# Altium PCB Sensor_PCB.PcbDoc
Units mm, origin at the board's own origin, x right, y up, seen from the top; angles counter-clockwise.
Board outline 42 x 42 mm, 2 copper layers (Top Layer, Bottom Layer); 33 components, 25 nets, 129 pads, 25 vias.
Unrouted connection lines stored in the file: 2.
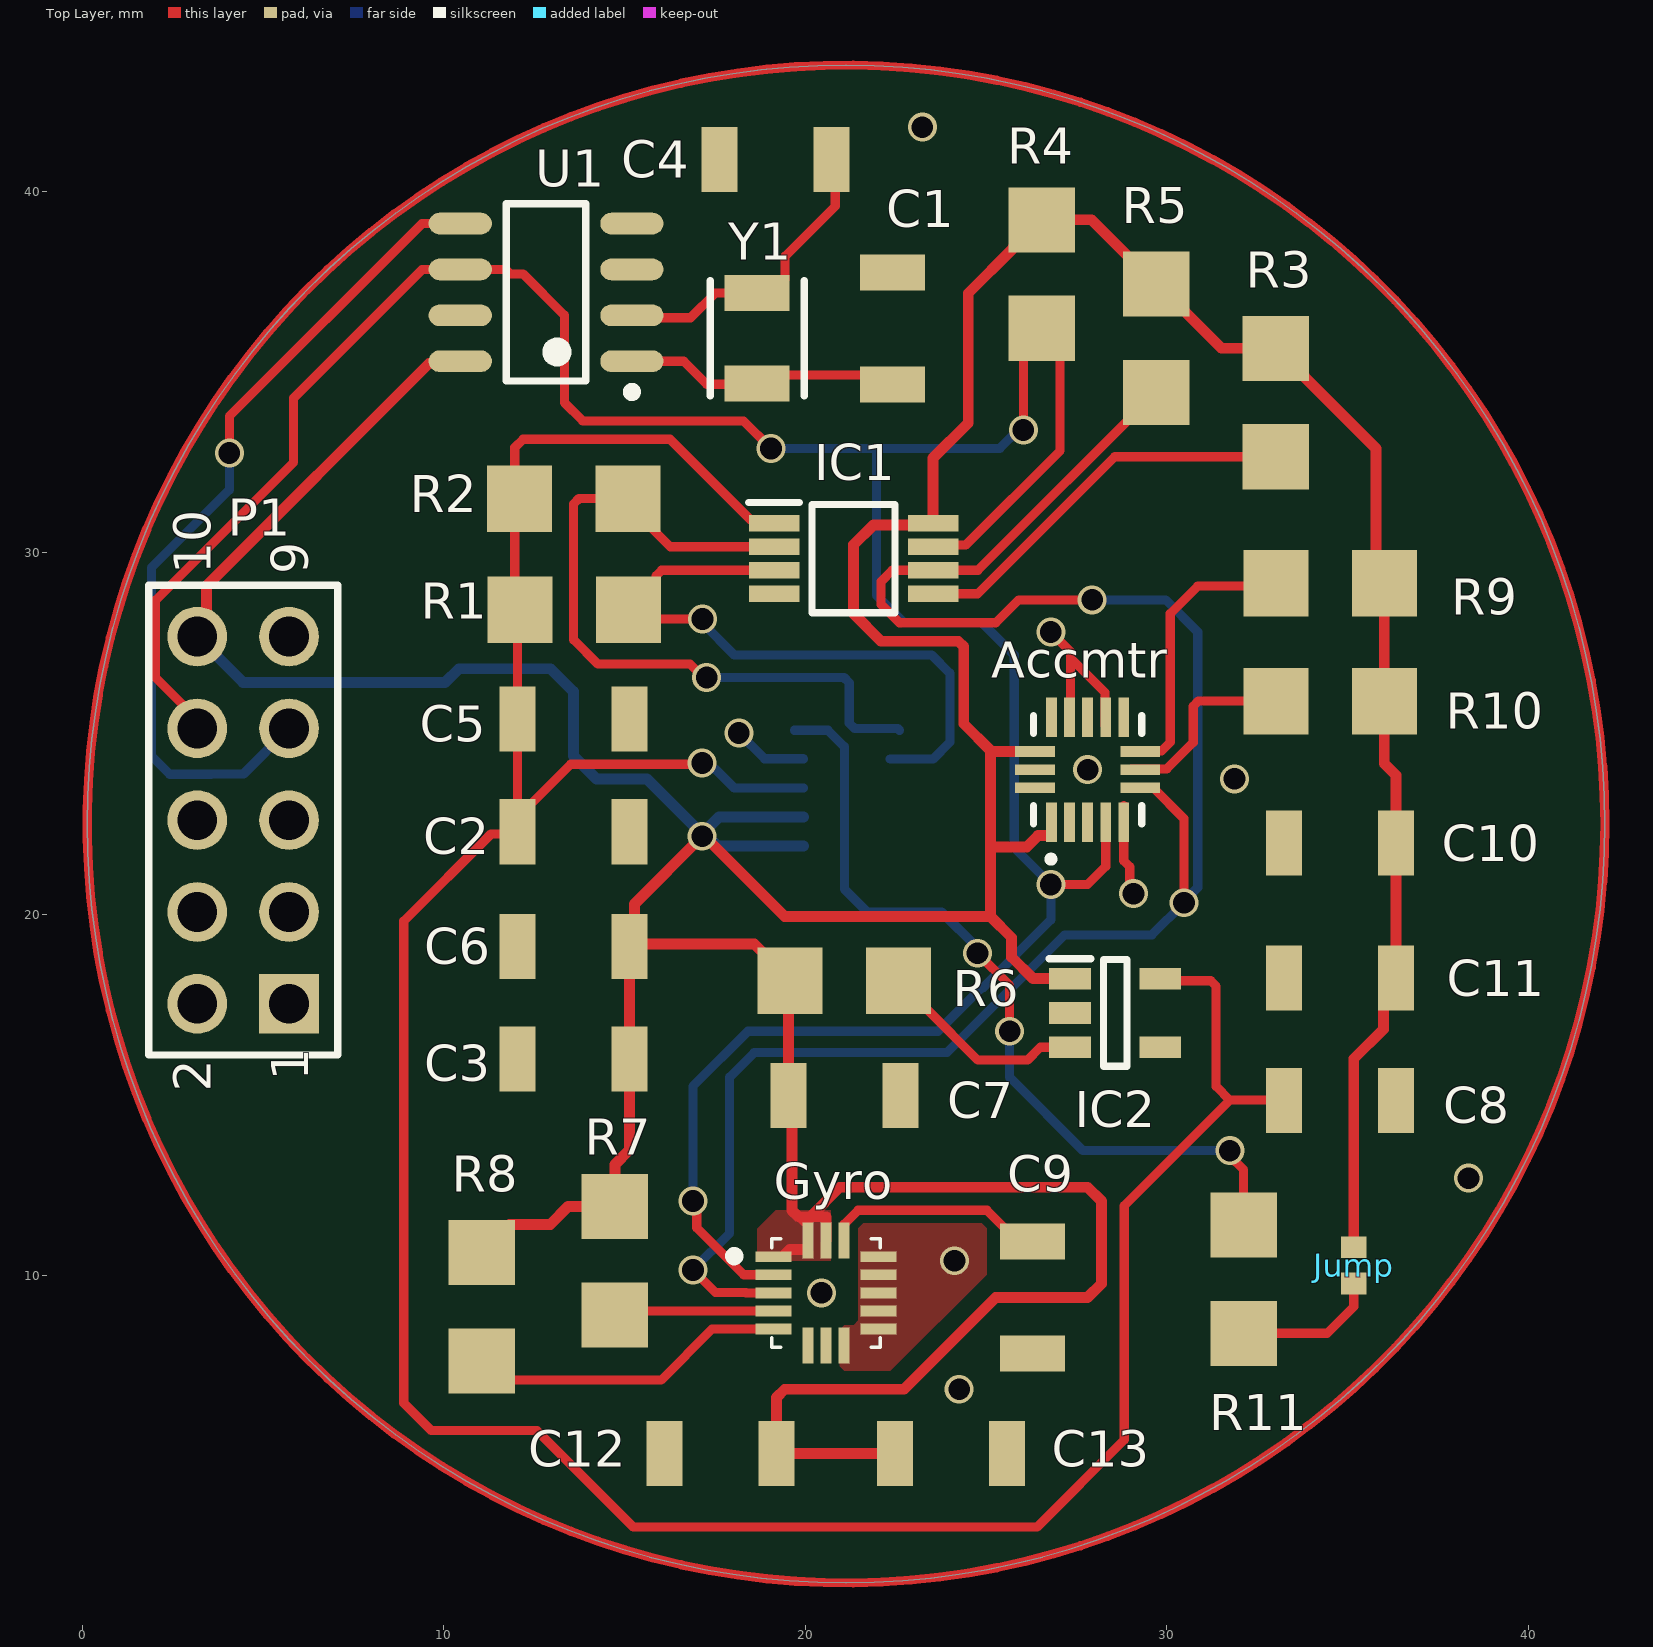
[diagram p0: Top Layer view]
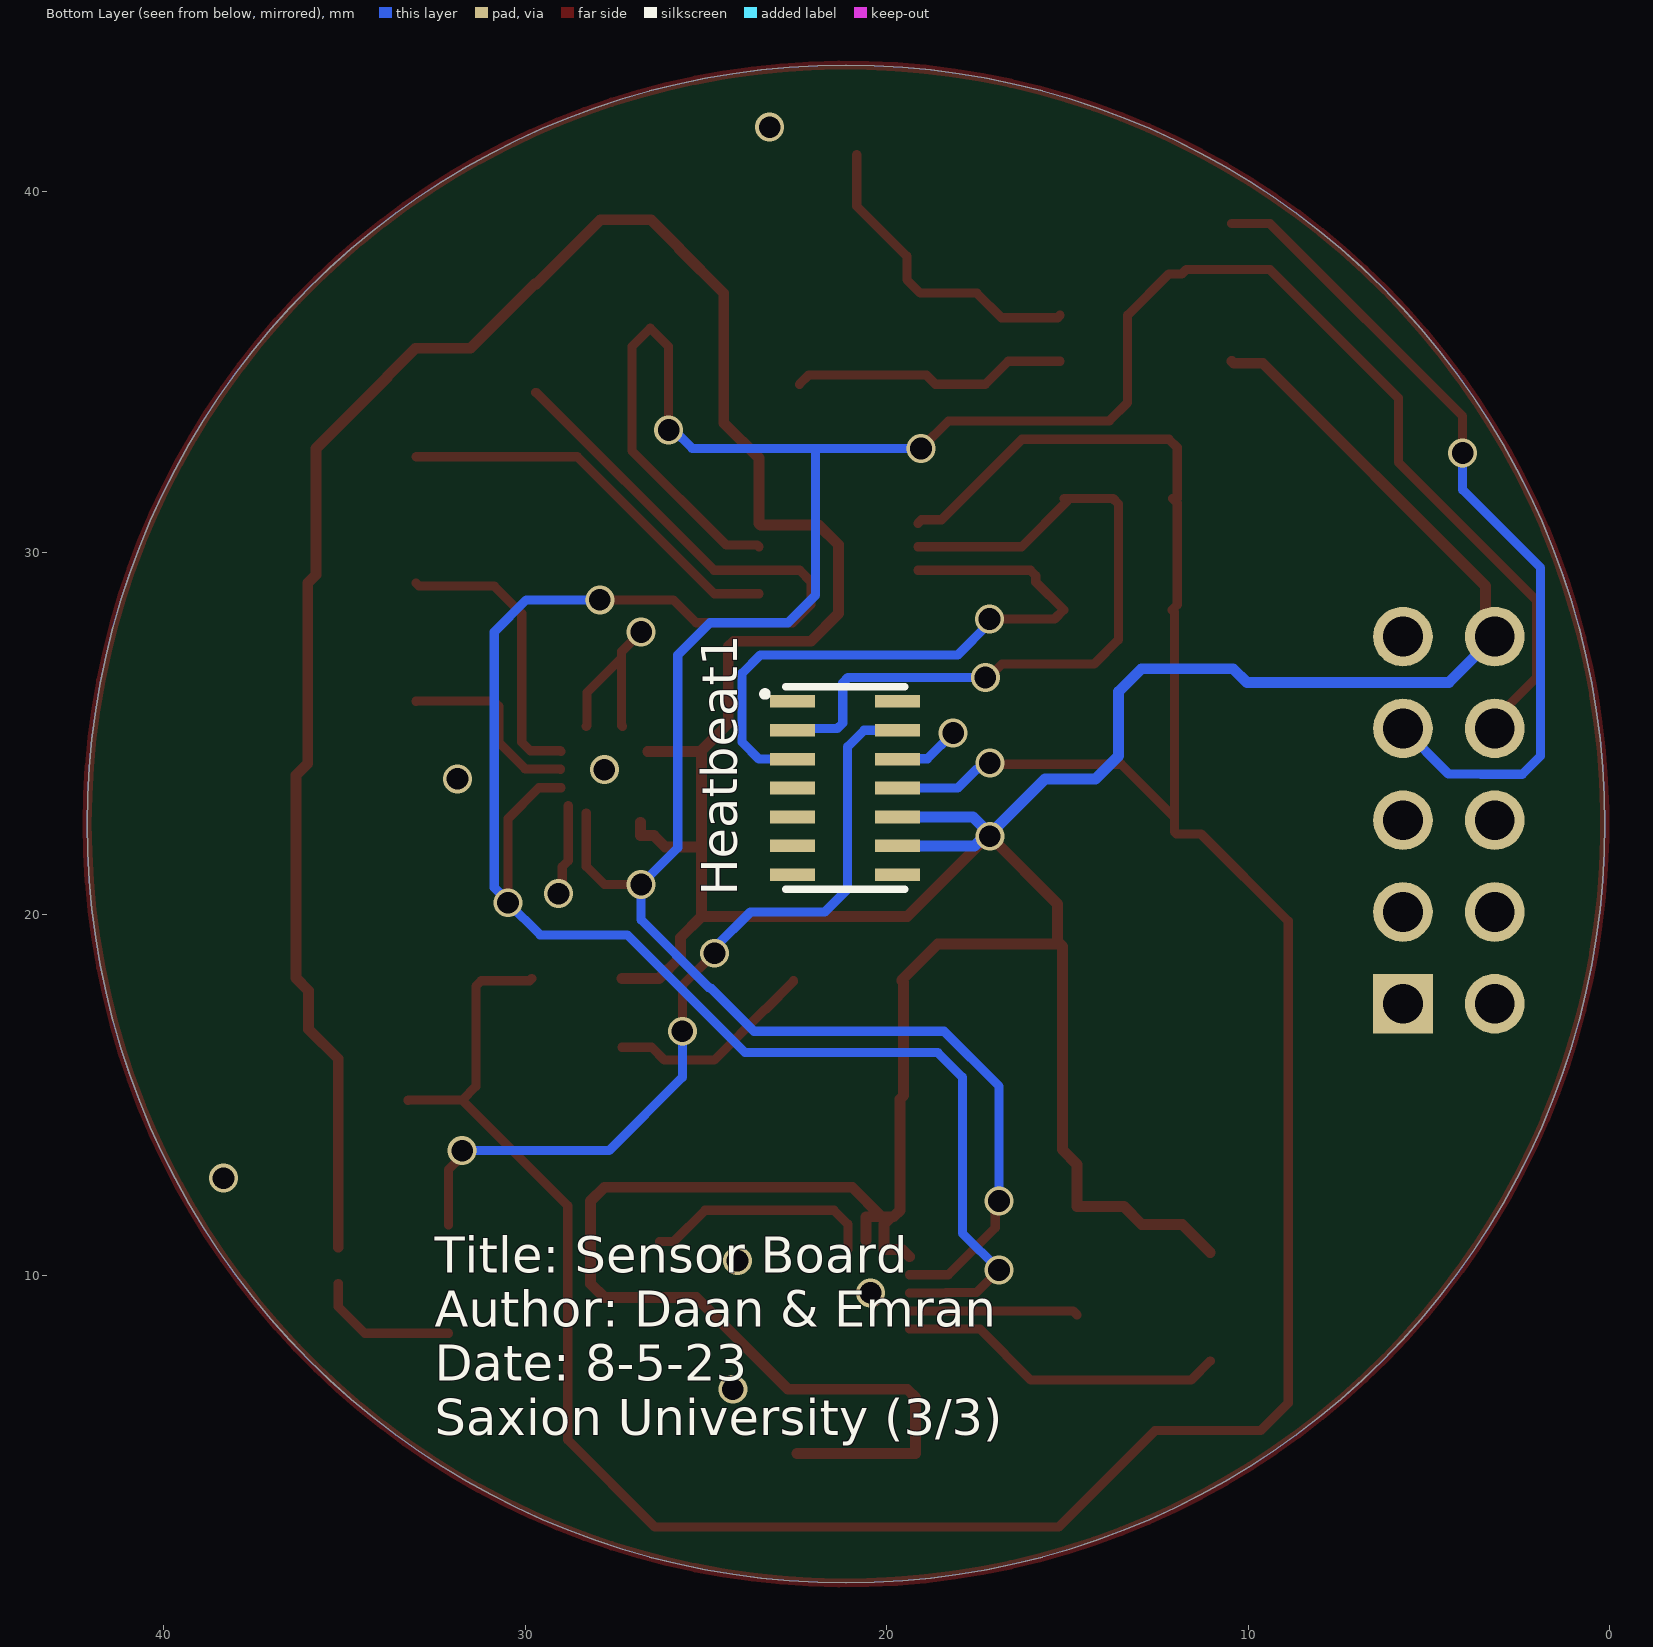
[diagram p1: Bottom Layer view, seen from below]
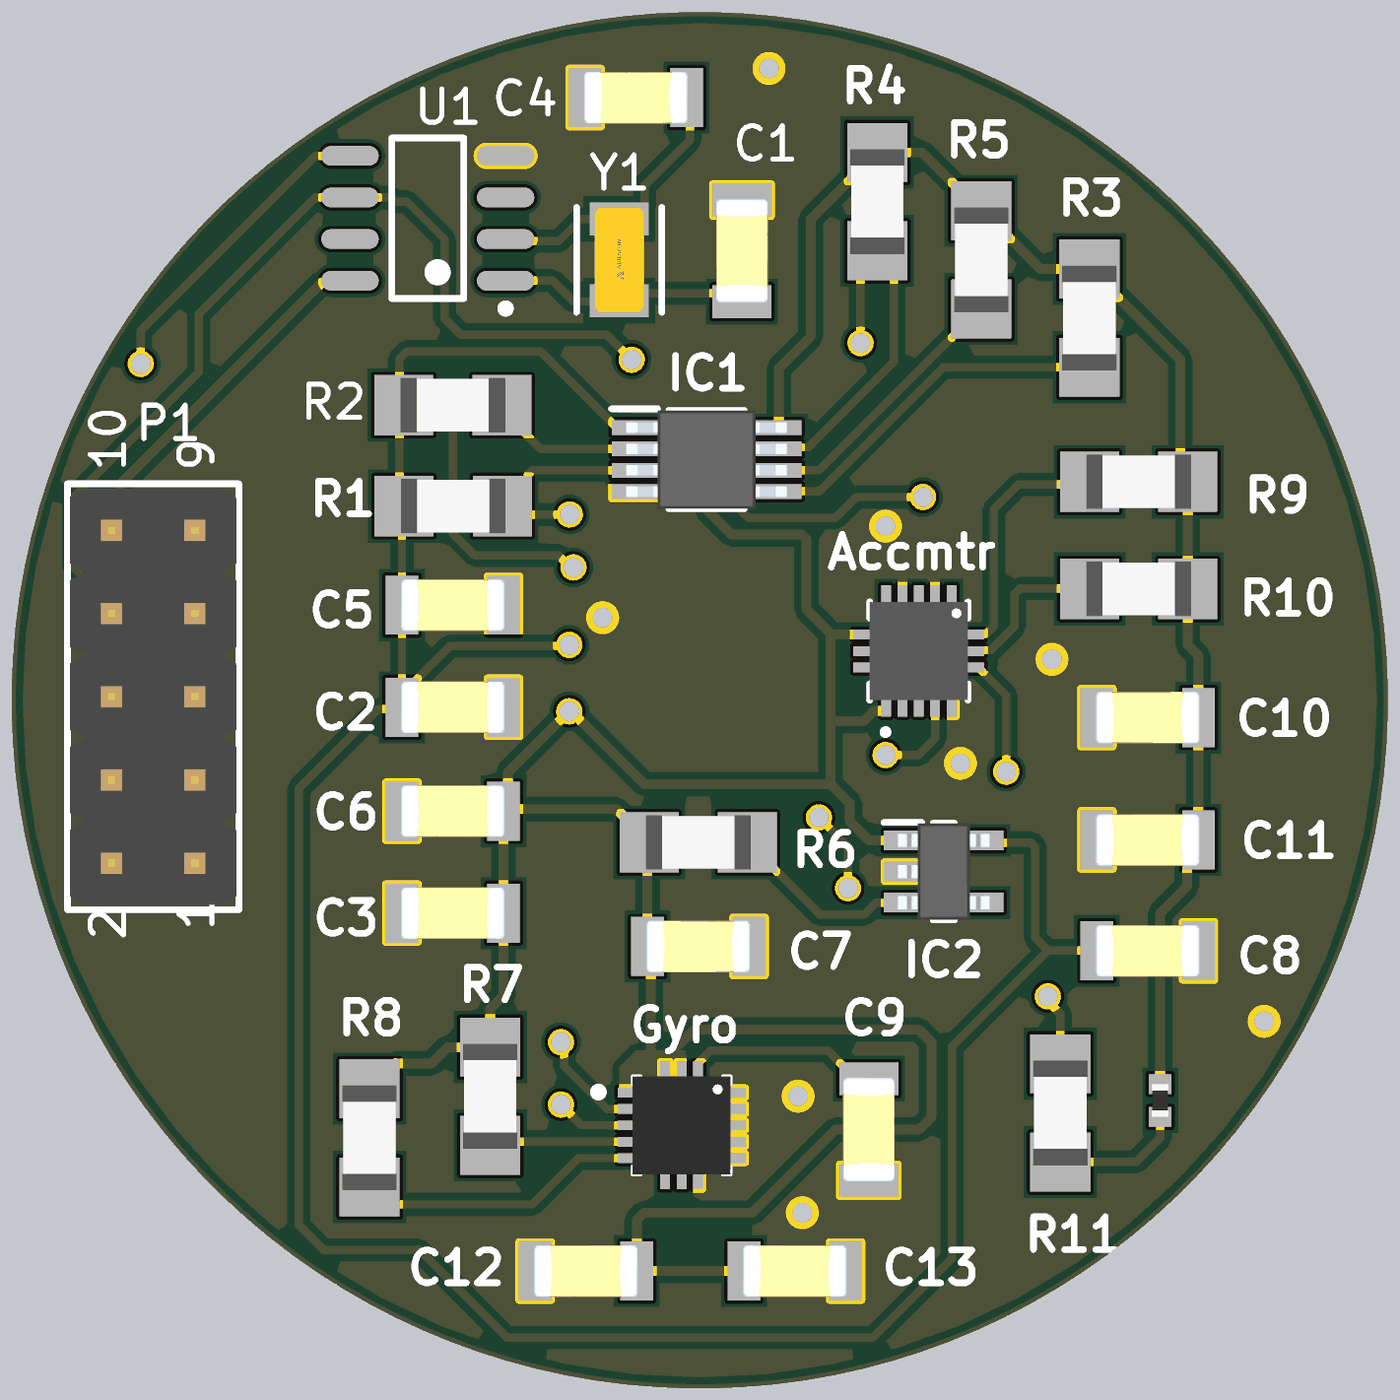
[diagram p2: 3D render of the assembled board from above, using the file's embedded part models]

## Layer stack, top to bottom
Top Solder: solder mask 0.0102, Solder Resist, Dk 3.5
Top Layer: signal copper 0.0356
Dielectric 1: dielectric 0.32, FR-4, Dk 4.8
Bottom Layer: signal copper 0.0356
Bottom Solder: solder mask 0.0102, Solder Resist, Dk 3.5

## Board outline
21.127,1.5 cw(c21.127,22.5) 0.127,22.5 cw(c21.127,22.5) 21.127,43.5 cw(c21.127,22.5) 42.127,22.5 cw(c21.127,22.5)

## Design rules (kind name [scope] priority, off if disabled: settings)
Clearance [All] p1: gap=0.2 ignorepadtopadclearanceinfootprint=FALSE
PlaneConnect [All] p1: planeconnectstyle=Relief reliefexpansion=0.508 reliefentries=4 reliefconductorwidth=0.3 reliefairgap=0.254
PolygonConnect [All] p1: connectstyle=Direct reliefconductorwidth=0.3 reliefentries=4 polygonreliefangle="90 Angle" airgapwidth=0.254
RoutingVias [All] p1: holewidth=0.711 width=1.27 viastyle="Through Hole" minholewidth=0.711 minwidth=1.27 maxholewidth=0.711 maxwidth=1.27
SolderMaskExpansion [All] p1: expansion=0.102 istentingtop=FALSE
Width [All] p1: maxlimit=0.5 minlimit=0.254 preferedwidth=0.3
29 further rules are at their usual default settings.

## Components (designator, comment, footprint, x,y, rotation, side; value= is the part's Value field where it differs from the comment)
Accmtr "LIS3DHTR" LIS3DHTR 27.813,24.003 r90 top (schematic designator Accmtr1)
C1 "6.8pF" CAP_1206 22.416,36.216 r90 top
C2 "C1206_16V" CAP_1206 13.589,22.285 r180 top
C3 "C1206_16V" CAP_1206 13.589,16.002 r0 top
C4 "6.8pF" CAP_1206 19.177,40.894 r180 top
C5 "C1206_16V" CAP_1206 13.589,25.4 r180 top
C6 "C1206_16V" CAP_1206 13.589,19.114 r0 top
C7 "C1206_16V" CAP_1206 21.082,14.986 r180 top
C8 "C1206_16V" CAP_1206 34.798,14.852 r180 top
C9 "C1206_50V" CAP_1206 26.289,9.398 r270 top
C10 "C1206_50V" CAP_1206 34.798,21.971 r0 top
C11 "C1206_50V" CAP_1206 34.798,18.236 r0 top
C12 "C1206_50V" CAP_1206 17.653,5.08 r0 top
C13 "C1206_50V" CAP_1206 24.029,5.08 r180 top
Gyro "L3GD20HTR" H3LIS100DLTR 20.574,9.525 r0 top (schematic designator Gyro1)
Heatbeat1 "MAX30102EFD+" 14-LEAD-OESIP 21.152,23.495 r180 bottom
IC1 "PCA9517ADMR2G" SOP65P490X110-8N 21.336,29.845 r0 top
IC2 "LDLN025M18R" SOT95P280X145-5N 28.575,17.272 r0 top
Jump "R0402" RES_0402 35.179,10.287 r90 top
P1 "61301021121" 61301021121 4.445,22.606 r90 top
R1 "R1206" RES_1206 13.602,28.425 r0 top
R2 "R1206" RES_1206 13.589,31.506 r0 top
R3 "R1206" RES_1206 33.02,34.163 r270 top
R4 "R1206" RES_1206 26.543,37.719 r270 top
R5 "R1206" RES_1206 29.718,35.941 r270 top
R6 "R1206" RES_1206 21.082,18.161 r0 top
R7 "R1206" RES_1206 14.732,10.414 r90 top
R8 "R1206" RES_1206 11.049,9.144 r90 top
R9 "R1206" RES_1206 34.523,29.166 r180 top
R10 "R1206" RES_1206 34.523,25.896 r180 top
R11 "4k7" RES_1206 32.131,9.906 r90 top
U1 "MCP7940M-I/SN" MCHP-SOIC-SN8_L 12.827,37.211 r180 top
Y1 "ABS07-120-32.768KHZ-T" FP-ABS07-120-MFG 18.669,35.941 r90 top

## Footprints (in the part's own frame and the unit in brackets; to place one, negate y for a bottom-side part, rotate by r counter-clockwise, add the part's x,y. Pads: shape width x height; smd on the part's side, far side on the other; paste and mask are expansions set on the pad)
14-LEAD-OESIP [mm]
  rect 1.25x0.35 smd: 1(-1.454,2.4) 2(-1.454,1.6) 3(-1.454,0.8) 4(-1.454,0) 5(-1.454,-0.8) 6(-1.454,-1.6) 7(-1.454,-2.4) 8(1.454,-2.4) 9(1.454,-1.6) 10(1.454,-0.8) 11(1.454,0) 12(1.454,0.8) 13(1.454,1.6) 14(1.454,2.4)
  silkscreen extent -2.28,-2.8 1.65,2.8, body extent -1.4,-2.8 1.4,2.8, height 1.3
61301021121 [mm] "Pin Header, pitch 2.54 mm, THT, Vertical, dual row, 10p"
  rect 1.65x1.65 hole 1.1: 1(-5.08,-1.27)
  round 1.65 hole 1.1: 2(-5.08,1.27) 3(-2.54,-1.27) 4(-2.54,1.27) 5(0,-1.27) 6(0,1.27) 7(2.54,-1.27) 8(2.54,1.27) 9(5.08,-1.27) 10(5.08,1.27)
  silkscreen extent -6.5,-2.62 6.5,2.62, body extent -6.35,-2.54 6.35,2.54, height 8.59
CAP_1206 [mm]
  rect 1x1.8 smd: 1(-1.55,0) 2(1.55,0)
  body extent -1.6,-0.8 1.6,0.8, height 0.94
FP-ABS07-120-MFG [mm]
  rect 1x1.8 smd paste+0 mask+0: 1(-1.25,0) 2(1.25,0)
  silkscreen extent -1.6,-1.3 1.6,1.3, body extent -1.85,-1 1.85,1, height 0.25
H3LIS100DLTR [mm]
  rect 1x0.3 smd: 1(-1.454,1) 2(-1.454,0.5) 3(-1.454,0) 4(-1.454,-0.5) 5(-1.454,-1) 9(1.454,-1) 10(1.454,-0.5) 11(1.454,0) 12(1.454,0.5) 13(1.454,1)
  rect 0.3x1 smd: 6(-0.5,-1.454) 7(0,-1.454) 8(0.5,-1.454) 14(0.5,1.454) 15(0,1.454) 16(-0.5,1.454)
  silkscreen extent -2.67,-1.5 1.5,1.5, body extent -1.5,-1.5 1.5,1.5, height 1
LIS3DHTR [mm]
  rect 1.1x0.3 smd: 1(-1.454,1) 2(-1.454,0.5) 3(-1.454,0) 4(-1.454,-0.5) 5(-1.454,-1) 9(1.454,-1) 10(1.454,-0.5) 11(1.454,0) 12(1.454,0.5) 13(1.454,1)
  rect 0.3x1.1 smd: 6(-0.5,-1.454) 7(0,-1.454) 8(0.5,-1.454) 14(0.5,1.454) 15(0,1.454) 16(-0.5,1.454)
  silkscreen extent -2.56,-1.5 1.5,1.5, body extent -1.5,-1.5 1.5,1.5, height 1
MCHP-SOIC-SN8_L [mm] "SOIC, 8-Leads, Body 4.9x3.9mm, Pitch 1.27mm, IPC High Density"
  oval 1.75x0.6 smd: 1(-2.375,1.905) 2(-2.375,0.635) 3(-2.375,-0.635) 4(-2.375,-1.905) 5(2.375,-1.905) 6(2.375,-0.635) 7(2.375,0.635) 8(2.375,1.905)
  silkscreen extent -2.5,-2.45 1.1,2.88, body extent -1.95,-2.45 1.95,2.45, height 1.75
RES_0402 [mm]
  rect 0.6x0.7 smd: 1(-0.5,0) 2(0.5,0)
  body extent -0.5,-0.25 0.5,0.25, height 0.3
RES_1206 [mm]
  rect 1.8x1.84 smd: 1(-1.5,0) 2(1.5,0)
  body extent -1.6,-0.83 1.6,0.83, height 0.57
SOP65P490X110-8N [mm]
  rect 1.4x0.45 smd: 1(-2.2,0.975) 2(-2.2,0.325) 3(-2.2,-0.325) 4(-2.2,-0.975) 5(2.2,-0.975) 6(2.2,-0.325) 7(2.2,0.325) 8(2.2,0.975)
  silkscreen extent -2.9,-1.5 1.15,1.55, body extent -2.45,-1.5 2.45,1.5, height 1.1
SOT95P280X145-5N [mm]
  rect 1.15x0.6 smd: 1(-1.25,0.95) 2(-1.25,0) 3(-1.25,-0.95) 4(1.25,-0.95) 5(1.25,0.95)
  silkscreen extent -1.83,-1.48 0.33,1.5, body extent -1.4,-1.48 1.4,1.48, height 1.45

## Part data
Accmtr: "Accelerometer", Manufacturer_Name=STMicroelectronics, Mouser Part Number=511-LIS3DHTR, Arrow Part Number=LIS3DHTR, Arrow Price/Stock=https://www.arrow.com/en/products/lis3dhtr/stmicroelectronics, Datasheet Link=http://www.st.com/content/ccc/resource/technical/document/datasheet/3c/ae/50/85/d6/b1/46/fe/CD00274221.pdf/files/CD00274221.pdf/jcr:content/translations/en.CD00274221.pdf, Height=1mm, Manufacturer_Part_Number=LIS3DHTR, Mouser Price/Stock=https://www.mouser.co.uk/ProductDetail/STMicroelectronics/LIS3DHTR?qs=6la6oa3D8xzhXYax3cEo4w%3D%3D
C1 C4 C9 C10 C11 C12 C13: library part CAP_1206_50V, "Capacitor SMD 1206 50V"
C2 C3 C5 C6 C7 C8: library part CAP_1206_16V, "Capacitor SMD 1206 16V"
Gyro: "MEMS motion sensor: /  three-axis digital output gyroscope", Manufacturer_Name=STMicroelectronics, Mouser Part Number=511-L3GD20HTR, Arrow Part Number=L3GD20HTR, Arrow Price/Stock=https://www.arrow.com/en/products/l3gd20htr/stmicroelectronics, Datasheet Link=http://www.st.com/content/ccc/resource/technical/document/datasheet/35/b1/e0/39/71/57/43/01/DM00060659.pdf/files/DM00060659.pdf/jcr:content/translations/en.DM00060659.pdf, Height=1mm, Manufacturer_Part_Number=L3GD20HTR, Mouser Price/Stock=https://www.mouser.co.uk/ProductDetail/STMicroelectronics/L3GD20HTR?qs=7v3IMFVTeKNoM%2F2Sb4QSlQ%3D%3D
Heatbeat1: "Integrated Circuit", Manufacturer_Name="Analog Devices", Mouser Part Number=700-MAX30102EFD+, Datasheet Link=https://datasheets.maximintegrated.com/en/ds/MAX30102.pdf, Manufacturer_Part_Number=MAX30102EFD+, Mouser Price/Stock=https://www.mouser.co.uk/ProductDetail/Maxim-Integrated/MAX30102EFD%2b?qs=nVS1qgv%252BQrk9UYEvS27V%2Fg%3D%3D
IC1: "Integrated Circuit", Manufacturer_Name=onsemi, Mouser Part Number=863-PCA9517ADMR2G, Arrow Part Number=PCA9517ADMR2G, Arrow Price/Stock=https://www.arrow.com/en/products/pca9517admr2g/on-semiconductor?region=nac, Datasheet Link=https://www.arrow.com/en/products/pca9517admr2g/on-semiconductor, Height=1.1mm, Manufacturer_Part_Number=PCA9517ADMR2G, Mouser Price/Stock=https://www.mouser.co.uk/ProductDetail/onsemi/PCA9517ADMR2G?qs=tCMd4XlZ%2FiBws0nQ3cmpKw%3D%3D
IC2: "Integrated Circuit", Manufacturer_Name=STMicroelectronics, Mouser Part Number=511-LDLN025M18R, Arrow Part Number=LDLN025M18R, Arrow Price/Stock=https://www.arrow.com/en/products/ldln025m18r/stmicroelectronics, Datasheet Link=https://mouser.componentsearchengine.com/Datasheets/2/LDLN025M18R.pdf, Height=1.45mm, Manufacturer_Part_Number=LDLN025M18R, Mouser Price/Stock=https://www.mouser.co.uk/ProductDetail/STMicroelectronics/LDLN025M18R?qs=5aG0NVq1C4xLjfzI8y7cFQ%3D%3D
Jump: library part RES_0402, "Resistor SMD 0402"
P1: library part CMP-1502-01084-1, "THT Vertical Pin Header WR-PHD, Pitch 2.54 mm, Dual Row, 10 pins", Contact Resistance=20mOhm, Manufacturer="Wurth Elektronik", Operating Temperature=-40to105degC, Rated Current=3A, Withstanding Voltage=500VAC, Working Voltage=250VAC, Datasheet URL=https://katalog.we-online.de/em/datasheet/6130xx21121.pdf, Gender=Male, Manufacturer URL=http://www.we-online.de, Mounting Technology=THT, Orientation=Vertical, Package Reference=61301021121, Packaging=Bag, Part Number=61301021121, Pin Number=10, Pitch=2.54mm, Publisher=WurthElektronik, Row Number=Dual
R1 R2 R3 R4 R5 R6 R7 R8 R9 R10 R11: library part RES_1206, "Resistor SMD 1206"
U1: library part CMP-0186-00321-1, "Low-Cost I2C™ Real-Time Clock / Calendar with SRAM, 400 KHz Communications Speed, 64 Bytes SRAM, -40 to 85 degC, 8-pin SOIC (SN8), Tube", Manufacturer=Microchip, ComponentLink1Description="Manufacturer URL", ComponentLink1URL=http://www.microchip.com, ComponentLink2Description=Datasheet, ComponentLink2URL=http://ww1.microchip.com/downloads/en/DeviceDoc/22292A.pdf, ComponentLink3Description="Package Specification", ComponentLink3URL=http://www.microchip.com/stellent/groups/techpub_sg/documents/packagingspec/en012702.pdf, ComponentLink4Description="Product URL", ComponentLink4URL=http://www.microchip.com/MCP7940M, DatasheetVersion="Rev. A", Mounting Technology="Surface Mount", PackageDescription="8-Lead Plastic Small Outline, 4.9 x 3.9 mm Body, 1.27 mm Pitch", PackageReference=SOIC-SN8, PackageVersion=C04-057C, PartNumber=MCP7940M-I/SN
Y1: library part CMP-2000-07587-2, "CRYSTAL 32.7680KHZ 6PF SMD", Case/Package=SMD/SMT, ESR (Equivalent Series Resistance)=55kR, Frequency=32.768kHz, Frequency Tolerance=20ppm, Load Capacitance=6pF, Max Operating Temperature=85°C, Min Operating Temperature=-40°C, Operating Frequency="32.768 kHz", Package Quantity=3000, Series Resistance=60kR, Depth=1.5mm, Height=0.035inch, Lead Free="Lead Free", Length=3.2mm, Mount="Surface Mount", Number of Pins=2, Packaging="Tape and Reel", Radiation Hardening=No, REACH SVHC="No SVHC", RoHS Compliant=Yes, Series=ABS07, Termination=SMD/SMT, Tolerance=20ppm, Width=0.061inch

## Via types
v1: diameter 0.8, hole 0.6, Top Layer to Bottom Layer, 25 vias

## Nets (pads, with @x,y where several pads share a name; then routed paths per layer and width w, separated by ;. In a path a pad name is that pad's centre, name@x,y a point inside that pad or via, vN(x,y) a via of type N, cw(c..) or ccw(c..) an arc to the next point about the centre after c; other vN are vias at no path point)
1.8V: C2.2 C5.2 C8.2 Heatbeat1.11 IC1.1 IC2.5 R1.1 R2.1 | length 85.3
  Top Layer w0.254: R2.1@11.962,31.506 11.962,32.917 12.192,33.147 16.256,33.147 18.485,30.918 19.038,30.918 IC1.1 ; R2.1 11.962,31.379 R1.1@11.962,28.565 ; v1(17.145,24.19) 17.111,24.156 13.51,24.156 12.039,22.685 C2.2 ; IC2.5 29.886,18.161 31.22,18.161 31.369,18.012 31.369,15.24 31.75,14.859 ; C8.2 33.241,14.859 31.75,14.859 ; R1.1@11.962,28.565 R1.1 ; R1.1@11.962,28.565 R1.1 ; C2.2 12.039,22.625 C5.2 12.039,28.362 R1.1 ; C2.2 11.979,22.225 11.303,22.225 8.89,19.812 8.89,6.477 9.652,5.715 12.573,5.715 15.24,3.048 26.416,3.048 28.829,5.461 28.829,11.938 31.75,14.859
  Bottom Layer w0.254: v1(17.145,24.19) 17.293,24.19 17.457,24.026 17.503,24.026 18.034,23.495 Heatbeat1.11@19.952,23.495
3.3V: Accmtr.1 Accmtr.14 C3.2 C6.2 C7.2 C10.2 C11.2 C12.2 C13.2 Gyro.1 Gyro.15 Gyro.16 Heatbeat1.9 Heatbeat1.10 IC1.8 IC2.1 Jump.2 P1.10 R3.1 R4.1 R5.1 R6.1 R7.2 R8.2 R9.1 R10.1 U1.8 | length 166.5
  Top Layer w0.3: P1.10 3.433,27.944 3.433,29.087 9.595,35.249 10.395,35.249 U1.8 ; R8.2 11.822,11.417 12.941,11.417 13.438,11.914 R7.2 14.732,13.081 15.139,13.488 C3.2 C6.2 15.271,19.246 15.271,20.288 v1(17.145,22.162) 17.208,22.162 19.431,19.939 25.123,19.939 ; C6.2@15.202,19.177 18.586,19.177 19.582,18.181 R6.1 19.532,18.111 C7.2 19.633,14.885 19.633,11.808 19.809,11.632 19.864,11.632 ; Gyro.1@19.374,10.525 19.574,10.725 20.074,10.725 20.074,11.422 19.864,11.632 ; Gyro.15 20.574,11.624 20.566,11.632 20.141,11.632 ; C13.2 C12.2 19.203,6.63 19.431,6.858 22.733,6.858 25.273,9.398 27.813,9.398 28.194,9.779 28.194,12.065 27.813,12.446 20.955,12.446 20.141,11.632 ; Accmtr.14@26.613,24.503 25.154,24.503 25.123,24.534 ; Accmtr.1 26.813,22.181 26.445,22.181 26.131,21.867 25.123,21.867 ; IC2.1 26.3,18.222 25.711,18.811 25.711,19.351 25.123,19.939 ; Jump.2 35.179,16.002 35.998,16.821 35.998,17.886 C11.2 C10.2 36.348,23.85 36.023,24.175 R9.1 35.79,29.399 35.79,32.893 33.813,34.87 33.813,34.89 33.04,35.663 R3.1 31.516,35.663 29.738,37.441 R5.1 29.698,37.441 27.92,39.219 R4.1 26.523,39.219 25.75,38.446 25.75,38.426 24.511,37.187 24.511,33.6 23.536,32.625 IC1.8 23.492,30.776 21.886,30.776 21.336,30.226 21.336,28.321 22.098,27.559 24.235,27.559 24.384,27.41 24.384,25.273 25.123,24.534 ; 19.864,11.632 20.141,11.632 ; 25.123,19.939 25.123,21.867 ; 25.123,21.867 25.123,24.534
  Bottom Layer w0.3: P1.10 4.445,26.416 10.033,26.416 10.414,26.797 12.954,26.797 13.589,26.162 13.589,24.384 14.224,23.749 15.621,23.749 v1@17.145,22.225 ; v1(17.145,22.162) v1@17.145,22.225 ; Heatbeat1.9@19.952,21.895 17.567,21.895 17.237,22.225 v1@17.145,22.225 ; Heatbeat1.10@19.952,22.695 17.615,22.695 v1@17.145,22.225
"CLK (2)": P1.5
GND: Accmtr.5 Accmtr.10 Accmtr.12 C1.2 C2.1 C3.1 C4.2 C5.1 C6.1 C7.1 C8.1 C9.2 C10.1 C11.1 C12.1 C13.1 Gyro.8 Gyro.9 Gyro.10 Gyro.11 Gyro.12 Gyro.13 Heatbeat1.4 Heatbeat1.12 IC1.4 IC2.2 P1.9 U1.4 | length 9.8
  Top Layer w0.254: v1(26.797,27.813) 27.336,27.274 27.336,27.096 ; Accmtr.12@27.313,25.203 27.336,25.226 27.336,27.096 ; Accmtr.10@28.313,25.203 28.29,25.226 28.29,26.142 27.336,27.096 ; Accmtr.5@28.813,23.003 28.813,21.482 28.979,21.316 28.979,20.678 v1(29.083,20.574)
  Bottom Layer w0.254: v1(18.161,25.019) 18.875,24.305 19.942,24.305 Heatbeat1.12@19.952,24.295
  other v1: 24.257,6.858 20.447,9.525 24.13,10.414 38.354,12.7 31.877,23.749 27.813,24.003 23.241,41.783
GPIO9/SDA: Accmtr.6 Gyro.3 IC1.6 R5.2 | length 54.9
  Top Layer w0.254: v1(16.891,10.16) 17.518,9.533 18.36,9.533 ; 18.36,9.525 Gyro.3@19.374,9.525 ; v1(27.94,28.702) 25.908,28.702 25.273,28.067 22.606,28.067 22.098,28.575 22.098,29.21 22.408,29.52 IC1.6 24.777,29.52 29.698,34.441 R5.2 ; Accmtr.6@29.013,23.503 29.627,23.503 30.48,22.65 v1(30.48,20.32)
  Bottom Layer w0.254: v1(16.891,10.16) 17.907,11.176 17.907,15.494 18.586,16.173 23.92,16.173 27.178,19.431 29.591,19.431 30.485,20.325 30.485,20.366 30.861,20.742 30.861,27.813 29.972,28.702 v1(27.94,28.702)
"IO4, BL(6)": P1.1
"IO5, CS(3)": P1.4
"IO16, RST(5)": P1.2
"IO17, D/MD(4)": P1.3
"MOSI (1)": P1.6
NetAccmtr_7: Accmtr.7 R10.2 | length 5.4
  Top Layer w0.254: Accmtr.7@29.026,24.016 29.036,24.026 30.002,24.026 30.734,24.758 30.734,25.759 30.883,25.908 33.011,25.908 R10.2
NetAccmtr_8: Accmtr.8 R9.2 | length 8
  Top Layer w0.254: Accmtr.8@29.013,24.503 29.036,24.526 29.86,24.526 30.099,24.765 30.099,28.321 30.861,29.083 32.94,29.083 R9.2
NetC1_1: C1.1 U1.1 Y1.1 | length 7.7
  Top Layer w0.254: U1.1 16.637,35.306 17.272,34.671 18.649,34.671 18.903,34.925 22.157,34.925 C1.1
NetC4_1: C4.1 U1.2 Y1.2 | length 8.7
  Top Layer w0.254: U1.2 15.268,36.51 16.825,36.51 17.506,37.191 19.069,37.191 19.442,37.564 19.442,38.213 20.828,39.599 C4.1@20.828,41.021
NetC9_1: C9.1 Gyro.14 | length 6.4
  Top Layer w0.254: Gyro.14@21.074,10.725 21.074,11.422 21.463,11.811 25.026,11.811 25.889,10.948 C9.1
NetGyro_4: Gyro.4 R7.1 | length 4.7
  Top Layer w0.254: R7.1 14.843,9.025 Gyro.4@19.374,9.025
NetGyro_5: Gyro.5 R8.1 | length 9.1
  Top Layer w0.2: 17.415,8.517 17.423,8.525
  Top Layer w0.254: R8.1 11.581,7.112 16.01,7.112 17.415,8.517 ; 17.423,8.525 Gyro.5@19.374,8.525
NetHeatbeat1_13: Heatbeat1.13 R11.2 | length 23
  Top Layer w0.254: v1(24.765,18.923) 25.654,18.034 v1(25.654,16.764) ; v1(31.75,13.462) 31.75,13.314 32.131,12.933 R11.2
  Bottom Layer w0.254: Heatbeat1.13 20.625,25.095 21.082,24.638 21.082,20.701 21.717,20.066 23.77,20.066 24.765,19.071 v1(24.765,18.923) ; v1(25.654,16.764) 25.654,15.494 27.686,13.462 v1(31.75,13.462)
NetIC1_5: IC1.5 R3.2 | length 11.1
  Top Layer w0.254: IC1.5 24.769,28.87 28.562,32.663 R3.2
NetIC2_3: IC2.3 R6.2 | length 5.8
  Top Layer w0.254: R6.2 22.582,18.141 23.355,17.368 23.375,17.368 24.777,15.966 26.15,15.966 26.506,16.322 IC2.3
NetJump_1: Jump.1 R11.1 | length 4
  Top Layer w0.254: R11.1 34.441,8.406 35.179,9.144 Jump.1
SCL: Accmtr.4 Gyro.2 IC1.7 P1.8 R4.2 U1.6 | length 86
  Top Layer w0.254: P1.8 3.175,25.4 2.023,26.552 2.023,28.693 5.842,32.512 5.842,34.29 9.398,37.846 11.708,37.846 11.835,37.719 12.192,37.719 13.335,36.576 13.335,34.163 13.843,33.655 18.288,33.655 v1(19.05,32.893) ; v1(16.891,12.065) 16.995,11.961 16.995,11.326 18.296,10.025 Gyro.2@19.374,10.025 ; IC1.7 23.587,30.221 24.441,30.221 27.051,32.831 27.051,35.711 R4.2 26.035,35.711 v1(26.035,33.401) ; v1(26.797,20.828) 27.813,20.828 28.313,21.328 Accmtr.4@28.313,22.803
  Bottom Layer w0.254: v1(16.891,12.065) 16.891,15.24 18.415,16.764 23.672,16.764 24.869,17.961 24.909,17.961 26.797,19.849 v1(26.797,20.828) 25.781,21.844 25.781,27.178 24.892,28.067 22.733,28.067 21.971,28.829 21.971,32.849 22.015,32.893 ; v1(19.05,32.893) 22.015,32.893 ; v1(26.035,33.401) 25.887,33.401 25.379,32.893 22.015,32.893
SCL_HRS: Heatbeat1.2 IC1.2 R2.2 | length 20.7
  Top Layer w0.254: R2.2@15.01,31.428 16.268,30.17 IC1.2 ; R2.2 13.738,31.506 13.589,31.357 13.589,27.599 14.264,26.924 16.813,26.924 17.184,26.553 v1(17.272,26.553)
  Bottom Layer w0.254: v1(17.272,26.553) 21.07,26.553 21.219,26.404 21.219,25.292 21.368,25.143 22.558,25.143 Heatbeat1.2
SDA: P1.7 U1.5 | length 23.4
  Top Layer w0.254: v1(4.064,32.766) 4.064,33.782 9.398,39.116 U1.5
  Bottom Layer w0.254: v1(4.064,32.766) 4.064,31.75 1.905,29.591 1.905,24.384 2.413,23.876 3.556,23.876 3.565,23.885 4.454,23.885 P1.7
SDA_HRS: Heatbeat1.3 IC1.3 R1.2 | length 18
  Top Layer w0.254: v1(17.158,28.171) 15.356,28.171 R1.2 15.875,29.198 15.875,29.371 16.024,29.52 IC1.3
  Bottom Layer w0.254: v1(17.158,28.171) 17.158,28.054 18.034,27.178 23.495,27.178 24.003,26.67 24.003,24.765 23.533,24.295 Heatbeat1.3@22.352,24.295
pads on no net: Accmtr.2 Accmtr.3 Accmtr.9 Accmtr.11 Accmtr.13 Accmtr.15 Accmtr.16 Gyro.6 Gyro.7 Heatbeat1.1 Heatbeat1.5 Heatbeat1.6 Heatbeat1.7 Heatbeat1.8 Heatbeat1.14 IC2.4 U1.3 U1.7
copper on no net: | length 131.9
  Top Layer w0.254: 42.127,22.5 ccw(c21.127,22.5) 42.127,22.5

## Polygon pours and split planes (outlines as drawn)
GND on Top Layer "NONET_L02_P-001" (solid, pour order 3): 21.61,11.457 21.463,11.31 21.463,8.763 21.336,8.636 21.082,8.636 20.955,8.509 20.955,7.493 21.082,7.366 22.352,7.366 25.019,10.033 25.019,11.317 24.879,11.457
GND on Top Layer "NONET_L01_P002" (solid, shelved, pour order 2): 0.127,22.5 ccw(c21.127,22.5) 21.127,1.5 ccw(c21.127,22.5) 42.127,22.5 ccw(c21.127,22.5) 21.127,43.5 ccw(c21.127,22.5)
3.3V on Top Layer "NONET_L02_P-001" (solid, pour order 0): 20.701,11.811 19.177,11.811 18.669,11.303 18.669,10.414 20.701,10.414
GND on Bottom Layer "NONET_L02_P001" (solid, shelved, pour order 1): 0.127,22.5 ccw(c21.127,22.5) 21.127,1.5 ccw(c21.127,22.5) 42.127,22.5 ccw(c21.127,22.5) 21.127,43.5 ccw(c21.127,22.5)

## Silkscreen, mask and mechanical layers (free items; w line width, h text height)
Bottom Overlay:
  text "Title: Sensor Board / Author: Daan & Emran / Date: 8-5-23 / Saxion University (3/3)" at 32.512,5.588 h1

## Text inside footprints (layer, text, board x,y; h text height)
P1: Top Overlay "10" at 3.545,29.416 h1.02 r90; Top Overlay "9" at 6.245,29.416 h1.02 r90; Top Overlay "1" at 6.245,15.396 h1.02 r90; Top Overlay "2" at 3.545,15.096 h1.02 r90